# Altium PCB WGA_IR_V11.PcbDoc (part 1 of 2)
Units mm, origin at the board's own origin, x right, y up, seen from the top; angles counter-clockwise.
Board outline 80.01 x 83.31 mm, 2 copper layers (Top Layer, Bottom Layer); 107 components, 87 nets, 363 pads, 349 vias.
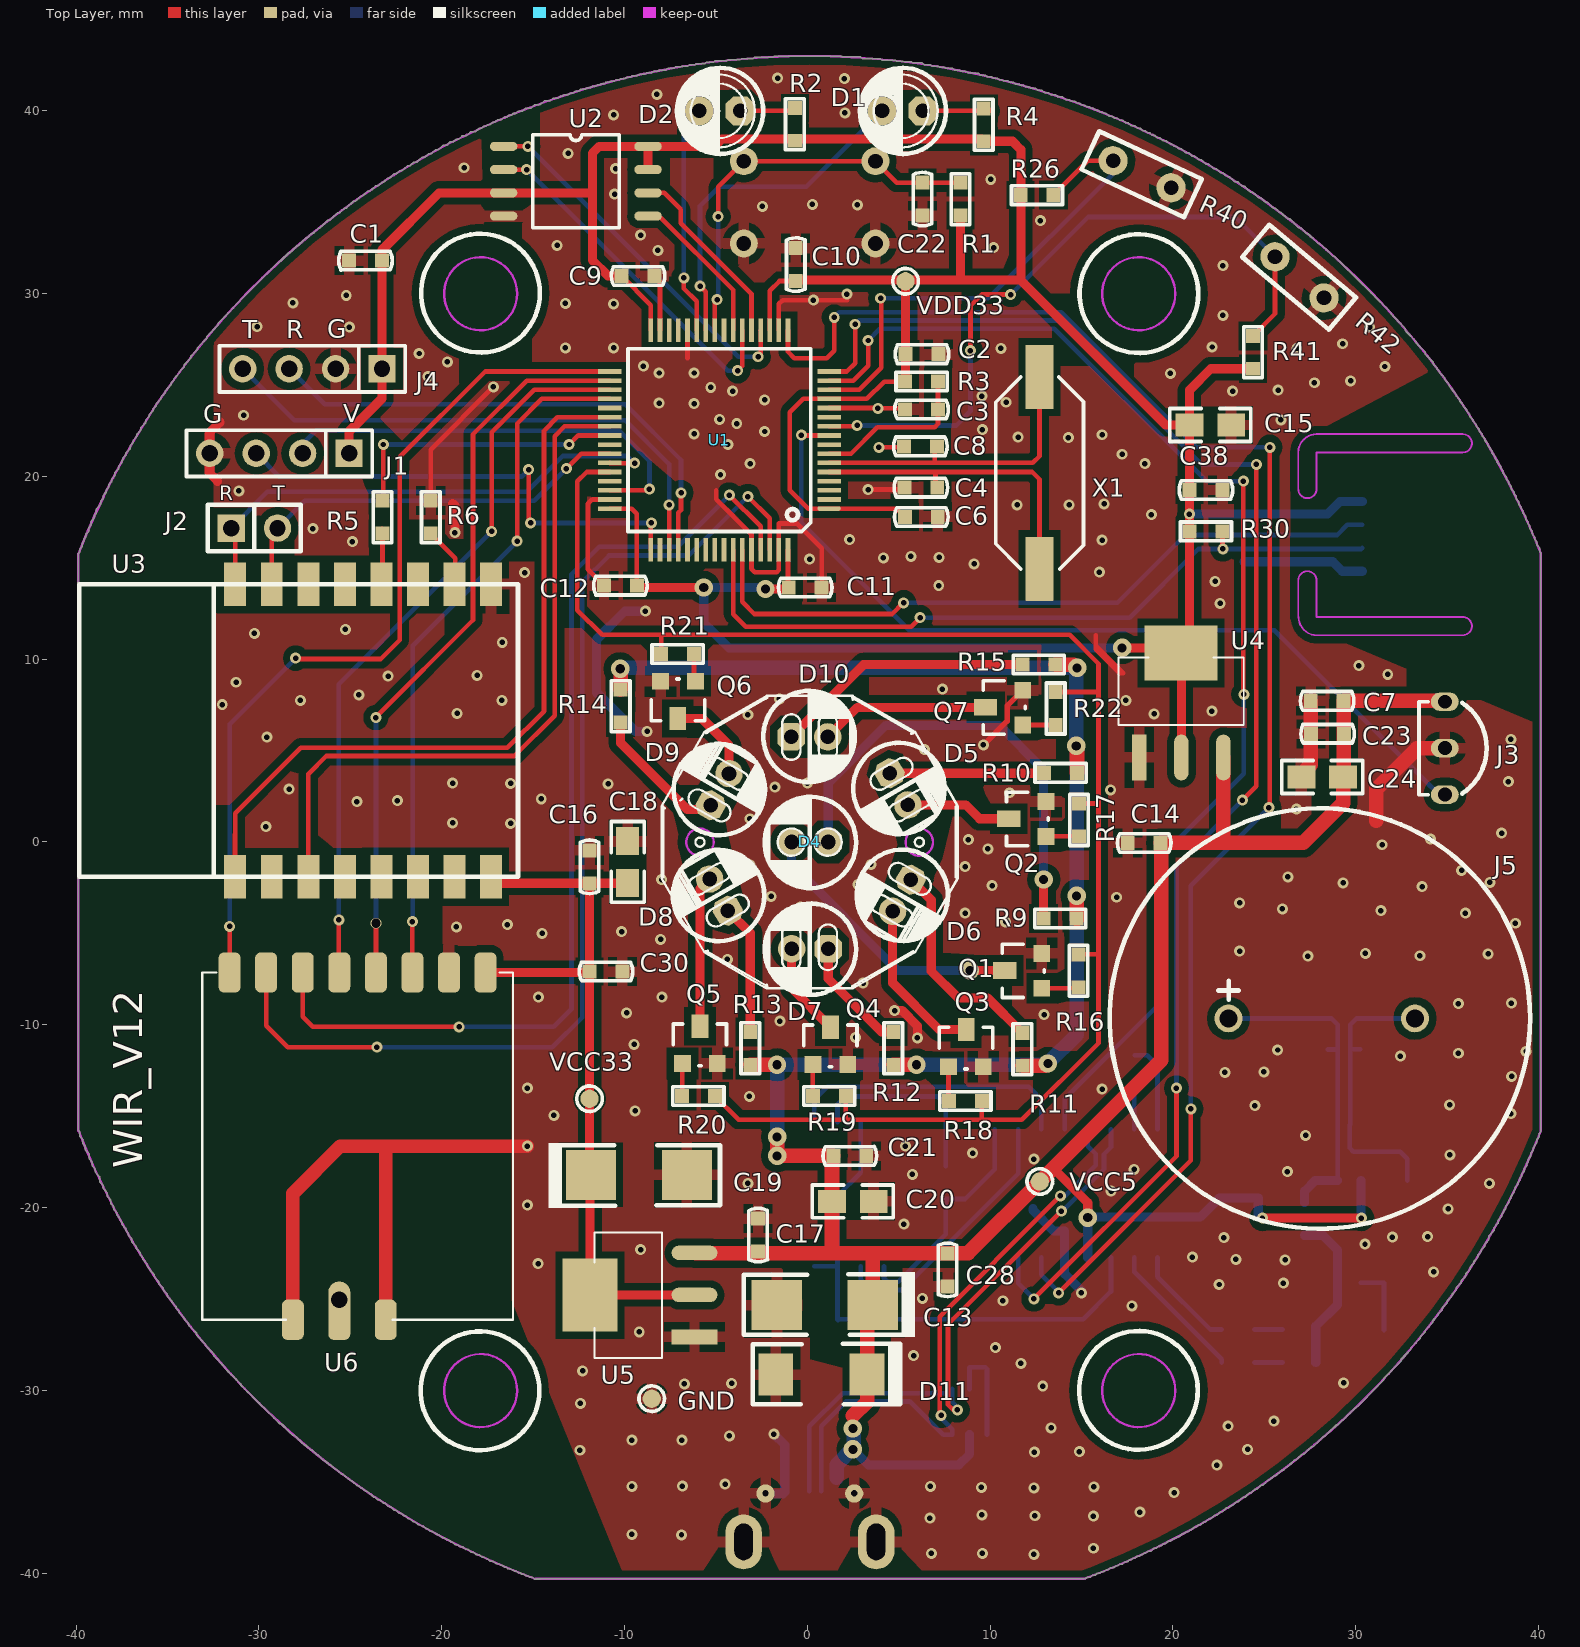
[diagram p0: Top Layer view]
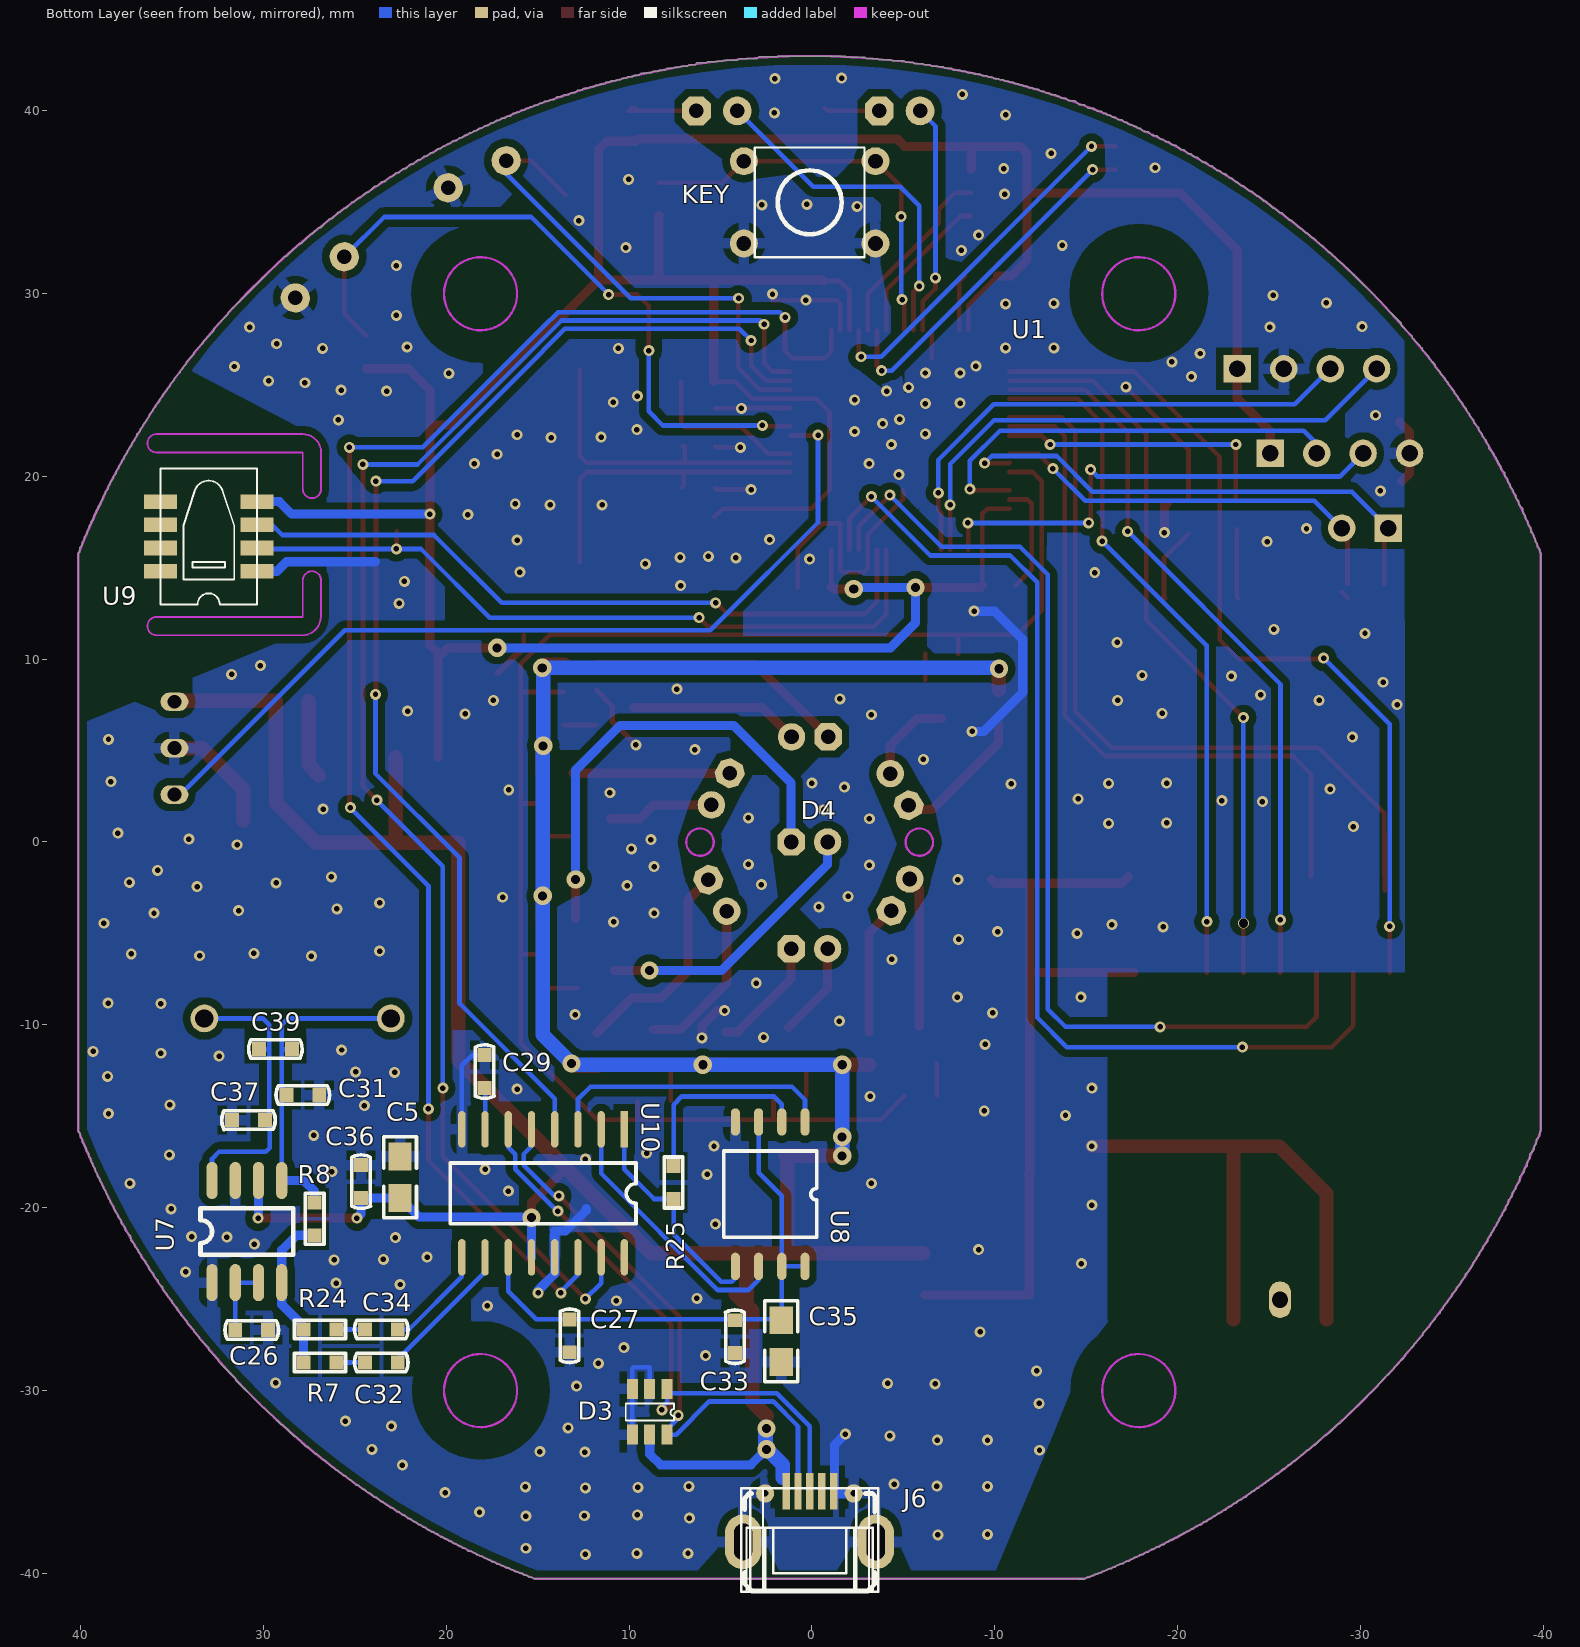
[diagram p1: Bottom Layer view, seen from below]
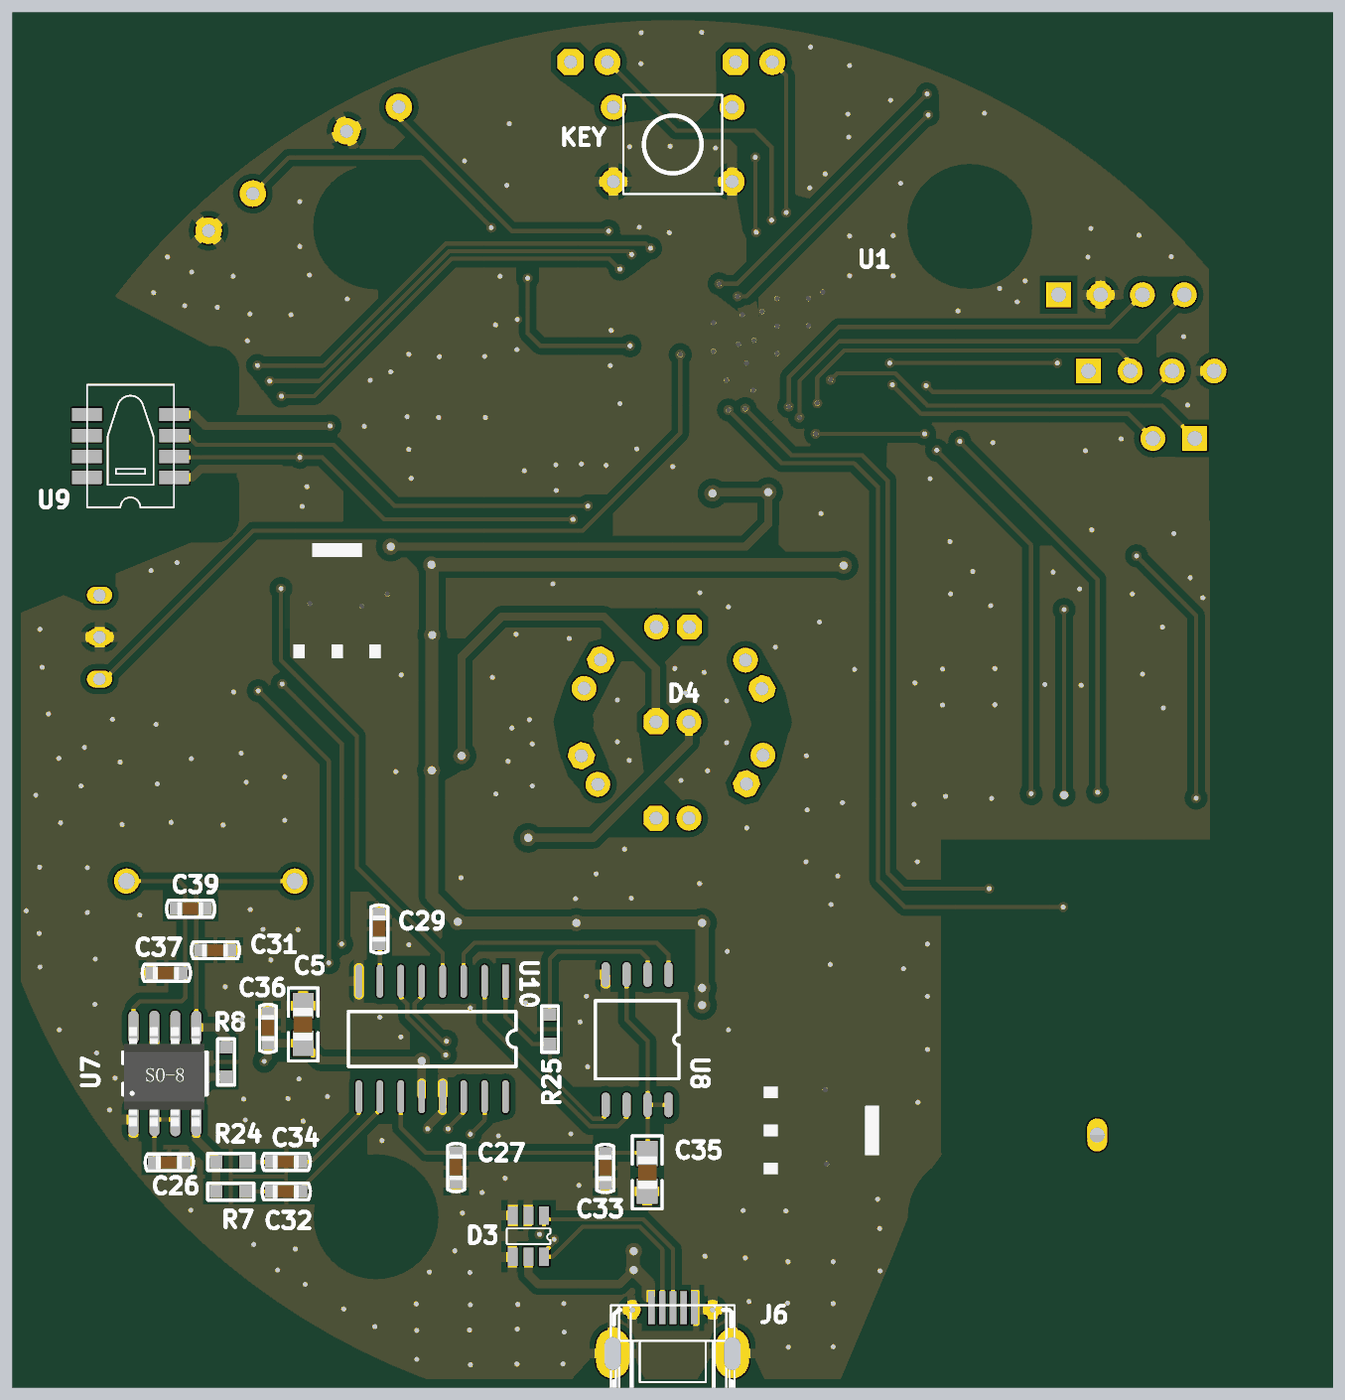
[diagram p3: 3D render of the assembled board from below, using the file's embedded part models]

## Layer stack, top to bottom
Top Solder: solder mask 0.0102, Solder Resist, Dk 3.5
Top Layer: signal copper 0.0356
Dielectric1: dielectric 0.32, FR-4, Dk 4.8
Bottom Layer: signal copper 0.0356
Bottom Solder: solder mask 0.0102, Solder Resist, Dk 3.5

## Board outline
1571 vertices, not listed, extent -39.878,-40.335 40.132,42.977

## Design rules (kind name [scope] priority, off if disabled: settings)
Clearance inpoly [inpoly] p1: gap=0.4 ignorepadtopadclearanceinfootprint=FALSE except(0: Arc-Hole Track-Hole SMDPad-Hole THPad-Hole Via-Hole Fill-Hole Poly-Hole Region-Hole Text-Hole)
Clearance [All] p2: gap=0.2 ignorepadtopadclearanceinfootprint=FALSE except(0: Arc-Hole Track-Hole SMDPad-Hole THPad-Hole Via-Hole Fill-Hole Poly-Hole Region-Hole Text-Hole)
FabricationTestPointUsage TestPointUsage [All] p1: valid=0 allowmultiple=FALSE
FabricationTestpoint Testpoint [(IsPad And (OnTopLayer Or OnBottomLayer))] p1: side=3 testpointundercomponent=TRUE minsize=1.016 maxsize=2.54 preferedsize=1.524 minholesize=0 maxholesize=1.016 preferedholesize=0.813 testpointgrid=0.025 allowsidetop=TRUE allowsidebottom=TRUE usegrid=TRUE gridtolerance=0
HoleSize [All] p1 off: absolutevalues=TRUE maxlimit=2.54 minlimit=0.025 maxpercent=80.000 minpercent=20.000
HoleToHoleClearance [All] p1 off: gap=0.203 allowstackedmicrovias=TRUE
LayerPairs [All] p1 off: enforce=TRUE
MinimumSolderMaskSliver [All] p1 off: minsoldermaskwidth=0.254
NetAntennae [All] p1 off: netantennaetolerance=0
PlaneConnect [All] p1: planeconnectstyle=Direct reliefexpansion=0.508 reliefentries=4 reliefconductorwidth=0.254 reliefairgap=0.254
PolygonConnect ISVIA [ISVIA] p1: connectstyle=Direct reliefconductorwidth=0.254 reliefentries=4 polygonreliefangle="90 Angle" airgapwidth=0.254
PolygonConnect [All] p2: connectstyle=Relief reliefconductorwidth=0.6 reliefentries=4 polygonreliefangle="90 Angle" airgapwidth=0.254
RoutingVias [All] p1: holewidth=0.3 width=0.6 viastyle="Through Hole" minholewidth=0.3 minwidth=0.6 maxholewidth=0.5 maxwidth=1
SilkToSilkClearance [All] p1 off: silktosilkclearance=0.254
SilkToSolderMaskClearance SilkscreenOverComponentPads [IsPad] p1 off: minsilkscreentomaskgap=0.254 clearancetoexposedcopper=TRUE
SolderMaskExpansion [All] p1: expansion=0.102
Width [All] p1: maxlimit=0.8 minlimit=0.254 preferedwidth=0.254
20 further rules are at their usual default settings.

## Classes and differential pairs
component class WGA_IR: C1 C2 C3 C4 C6 C8 C9 C10 C11 C12 D1 D2 J1 R2 R3 R4 U1 U2 X1
component class WGA_IR_P: C5 C7 C13 C14 C15 C16 C17 C18 C19 C20 C21 C22 C23 C24 C26 C27 C28 C29 C30 C31 C32 C33 C34 C35 C36 C37 C38 C39 D3 D4 D5 D6 D7 D8 D9 D10 D11 GND J2 J3 J4 J5 J6 KEY Q1 Q2 Q3 Q4 Q5 Q6 Q7 R1 R5 R6 R7 R8 R9 R10 R11 R12 R13 R14 R15 R16 R17 R18 R19 R20 R21 R22 R24 R25 R26 R30 R40 R41 R42 U3 U4 U5 U6 U7 U8 U9 U10 VCC5 VCC33 VDD33

## Components (designator, comment, footprint, x,y, rotation, side; value= is the part's Value field where it differs from the comment)
C1 "CC0603ZRY5V9BB104" C0603 -23.266,31.801 r180 top
C2 "CC0603ZRY5V9BB104" C0603 5.372,26.683 r0 top
C3 "CC0603ZRY5V9BB104" C0603 5.347,23.66 r0 top
C4 "CC0603JRNPO9BN200" C0603 5.309,19.38 r0 top
C5 "CC0805ZKY5V6BB106" C0805 22.53,-19.482 r90 bottom
C6 "CC0603ZRY5V9BB104" C0603 5.334,17.78 r0 top
C7 "CC0603JRNPO9BN101" C0603 29.337,7.722 r180 top
C8 "CC0603JRNPO9BN200" C0603 5.283,21.641 r0 top
C9 "CC0603ZRY5V9BB104" C0603 -10.16,30.963 r0 top
C10 "CC0603ZRY5V9BB104" C0603 -0.635,30.683 r90 top
C11 "CC0603ZRY5V9BB104" C0603 -1.016,13.919 r0 top
C12 "CC0603ZRY5V9BB104" C0603 -9.322,14.021 r180 top
C13 "TAJC227K010RNJ" C6032 3.581,-25.334 r180 top
C14 "CC0603ZRY5V9BB104" C0603 17.526,-0.051 r0 top
C15 "CC0805ZKY5V6BB106" C0805 20.904,22.809 r0 top
C16 "CC0603ZRY5V9BB104" C0603 -11.913,-2.261 r90 top
C17 "CC0603ZRY5V9BB104" C0603 -2.692,-20.599 r270 top
C18 "CC0805ZKY5V6BB106" C0805 -9.83,-2.235 r90 top
C19 "TAJC227K010RNJ" C6032 -11.836,-18.212 r0 top
C20 "CC0805ZKY5V6BB106" C0805 1.346,-19.66 r0 top
C21 "CC0603ZRY5V9BB104" C0603 1.422,-17.17 r0 top
C22 "CC0603ZRY5V9BB104" C0603 6.299,36.068 r270 top
C23 "CC0603ZRY5V9BB104" C0603 29.362,5.918 r180 top
C24 "CC0805ZKY5V6BB106" C0805 29.312,3.556 r180 top
C26 "CC0603ZRY5V9BB104" C0603 31.547,-26.695 r180 bottom
C27 "CC0603ZRY5V9BB104" C0603 13.259,-26.111 r270 bottom
C28 "CC0603ZRY5V9BB104" C0603 7.671,-22.504 r270 top
C29 "CC0603ZRY5V9BB104" C0603 17.907,-11.659 r270 bottom
C30 "CC0603ZRY5V9BB104" C0603 -11.913,-7.087 r0 top
C31 "CC0603JRNPO9BN330" C0603 28.753,-13.843 r180 bottom
C32 "CC0603ZRY5V9BB104" C0603 24.46,-28.471 r180 bottom
C33 "CC0603ZRY5V9BB104" C0603 4.216,-26.162 r270 bottom
C34 "CC0603ZRY5V9BB104" C0603 24.46,-26.668 r180 bottom
C35 "CC0805ZKY5V6BB106" C0805 1.676,-26.162 r270 bottom
C36 "CC0603ZRY5V9BB104" C0603 24.663,-17.678 r270 bottom
C37 "CC0603JRNPO9BN330" C0603 31.725,-15.215 r180 bottom
C38 "CC0603ZRY5V9BB104" C0603 20.904,19.253 r0 top
C39 "CC0603JRNPO9BN101" C0603 30.251,-11.328 r180 bottom
D1 "VLMS1300-GS08" T1-3MM_N 6.627,39.99 r0 top
D2 "VLMS1300-GS08" T1-3MM_N -3.373,39.99 r0 top
D3 "SRV05-4" SRV05-4 7.925,-29.921 r0 bottom
D4 "IRLED" "T1-5MM - 2N" 1.143,0 r0 top locked
D5 "IRLED" "T1-5MM - 2N" 4.501,3.759 r120 top locked
D6 "IRLED" "T1-5MM - 2N" 5.664,-2.057 r60 top locked
D7 "IRLED" "T1-5MM - 2N" 1.143,-5.842 r0 top locked
D8 "IRLED" "T1-5MM - 2N" -4.343,-3.759 r300 top
D9 "IRLED" "T1-5MM - 2N" -5.283,2.007 r240 top locked
D10 "IRLED" "T1-5MM - 2N" -0.882,5.747 r180 top locked
D11 "SMBJ6.0CA" D3528 -1.727,-29.134 r180 top
GND "CON1" PAD -8.509,-30.455 r90 top
J1 "CON4" SIP4 -25.07,21.26 r180 top
J2 "CON2-SIP2" SIP2 -31.521,17.17 r0 top
J3 "CON3" TO-92C 34.874,5.131 r90 top
J4 "调试串口" SIP4 -23.266,25.883 r180 top
J5 "喇叭" 加盖喇叭 23.038,-9.652 r0 top locked
J6 "0675031020" MICRO_USB-B -2.286,-35.636 r0 bottom locked
KEY "SW-PB 4" SWITCH(6*6*7) 3.127,37.99 r270 bottom
Q1 "NPN-SOT23" SOT23 12.827,-8.001 r90 top
Q2 "NPN-SOT23" SOT23 13.056,0.305 r90 top
Q3 "NPN-SOT23" SOT23 7.722,-12.294 r0 top
Q4 "NPN-SOT23" SOT23 0.305,-12.167 r0 top
Q5 "NPN-SOT23" SOT23 -6.833,-12.116 r0 top
Q6 "NPN-SOT23" SOT23 -6.121,8.788 r180 top
Q7 "NPN-SOT23" SOT23 11.786,6.401 r90 top
R1 "RC0603JR-0710KL" R0603 8.382,34.265 r90 top
R2 "RC0603JR-071KL" R0603 -0.686,40.157 r270 top
R3 "RC0603JR-07100KL" R0603 7.15,25.184 r180 top
R4 "RC0603JR-071KL" R0603 9.652,40.132 r270 top
R5 "RC0603JR-0710KL" R0603 -23.241,18.669 r270 top
R6 "RC0603JR-0710KL" R0603 -20.599,18.669 r270 top
R7 "RC0603JR-0720KL" R0603 27.813,-28.473 r180 bottom
R8 "RC0603JR-0747KL" R0603 27.203,-21.514 r90 bottom
R9 "RC0603JR-07470RL" R0603 12.929,-4.191 r0 top
R10 "RC0603JR-07470RL" R0603 12.954,3.785 r0 top
R11 "RC0603JR-07470RL" R0603 11.76,-10.439 r270 top
R12 "RC0603JR-07470RL" R0603 4.699,-10.389 r270 top
R13 "RC0603JR-07470RL" R0603 -3.124,-10.389 r270 top
R14 "RC0603JR-07470RL" R0603 -10.211,6.528 r90 top
R15 "RC0603JR-07470RL" R0603 11.76,9.703 r0 top
R16 "R0603" R0603 14.834,-7.95 r90 top
R17 "R0603" R0603 14.859,0.305 r90 top
R18 "R0603" R0603 7.747,-14.173 r0 top
R19 "R0603" R0603 0.305,-13.894 r0 top
R20 "R0603" R0603 -6.858,-13.894 r0 top
R21 "R0603" R0603 -6.198,10.287 r180 top
R22 "R0603" R0603 13.589,6.401 r90 top
R24 "RC0603JR-0720KL" R0603 27.813,-26.67 r180 bottom
R25 "RC0603JR-07100RL" R0603 7.569,-17.729 r270 bottom
R26 "390R/22K" R0603 13.462,35.382 r180 top
R30 "RC0603JR-0710KL" R0603 22.708,16.993 r180 top
R40 "JK250-110U" JK250-110U 18.313,36.525 r155 top
R41 "390R/22K" R0603 24.384,27.686 r270 top
R42 "JK250-110U" JK250-110U 26.924,30.886 r140 top
U1 "STM32F103RCT6" LQFP64 1.194,18.237 r180 top
U2 "MX25L3206EM2I-12G" SSOP8 -16.612,38.049 r0 top
U3 "ESP8266-12F" ESP-12F -15.697,14.097 r90 top
U4 "REG1117-3.3/2K5" SOT223 18.161,4.623 r0 top
U5 "REG1117-3.3/2K5" SOT223 -6.172,-27.076 r90 top
U6 "HPD8402A-433S" HPD8402A-433S -17.602,-7.137 r270 top locked
U7 "8002A" SO8 32.817,-24.105 r90 bottom
U8 "MX25L3206EM2I-12G" SSOP8 0.381,-15.316 r270 bottom
U9 "SHT10" SHT10 30.353,14.808 r90 bottom
U10 "JQ8400" SOP16 10.262,-15.723 r270 bottom
VCC5 "CON1" PAD 12.717,-18.576 r90 top
VCC33 "CON1" PAD -11.913,-14.046 r90 top
VDD33 "CON1" PAD 5.372,30.67 r90 top
X1 "9C-8.000MBBK-T" XTAL2 12.7,14.935 r90 top

## Footprints (in the part's own frame and the unit in brackets; to place one, negate y for a bottom-side part, rotate by r counter-clockwise, add the part's x,y. Pads: shape width x height; smd on the part's side, far side on the other; paste and mask are expansions set on the pad)
C0603 [mil]
  rect 30x30 smd: 1(0,0) 2(70.87,0)
  silkscreen extent -22,-20 93,20, body extent 3,-16 66,15, height 24
C0805 [mil]
  rect 60x50 smd: 1(0,0) 2(90,0)
  silkscreen extent -42,-35 132,35, body extent 6,-23 85,24, height 47
C6032 [mm]
  rect 2.75x2.75 smd: 1(0,0) 2(5.25,0)
  silkscreen extent -2.31,-1.8 7.06,1.75, body extent -0.38,-1.83 5.62,1.58, height 2.73
D3528 [mil]
  rect 75x90 smd: 1(0,0) 2(-196.85,0)
  silkscreen extent -268,-66 49,64, body extent -210,-54 7,56, height 114
ESP-12F [mm] "WIFI  ESP8266"
  rect 2.4x1.2 smd: 1(-16.002,15.6) 2(-16.002,13.6) 3(-16.002,11.6) 4(-16.002,9.6) 5(-16.002,7.6) 6(-16.002,5.6) 7(-16.002,3.6) 8(-16,1.6) 15(0,1.6) 16(0,3.6) 17(0,5.6) 18(0,7.6) 19(0,9.6) 20(0,11.6) 21(0,13.6) 22(0,15.6)
  silkscreen extent -16,0.13 0,24.13
HPD8402A-433S [mm]
  rrect50% 2.2x1.2 smd: 1(0,0) 2(0,-2) 3(0,-4) 4(0,-6) 5(0,-8) 6(0,-10) 7(0,-12) 8(0,-14) 9(19,-8) 10(19,-5.46) 11(19,-10.54)
  oval 2x1.2 hole 0.9: 9(17.9,-8)
  silkscreen extent 0,-15.5 19,1.5
JK250-110U [mm]
  round 1.6 hole 0.8: 1(-1.75,0) 2(1.75,0)
  silkscreen extent -3.07,-1.14 3.12,1.17
LQFP64 [mil]
  oval 50x10 smd: 1(0,0)
  rect 50x10 smd: 2(0,-19.69) 3(0,-39.37) 4(0,-59.06) 5(0,-78.74) 6(0,-98.43) 7(0,-118.11) 8(0,-137.8) 9(0,-157.48) 10(0,-177.17) 11(0,-196.85) 12(0,-216.54) 13(0,-236.22) 14(0,-255.91) 15(0,-275.59) 16(0,-295.28) 33(472.44,-295.28) 34(472.44,-275.59) 35(472.44,-255.91) 36(472.44,-236.22) 37(472.44,-216.54) 38(472.44,-196.85) 39(472.44,-177.17) 40(472.44,-157.48) 41(472.44,-137.8) 42(472.44,-118.11) 43(472.44,-98.43) 44(472.44,-78.74) 45(472.44,-59.06) 46(472.44,-39.37) 47(472.44,-19.69) 48(472.44,0)
  rect 10x50 smd: 17(88.58,-383.86) 18(108.27,-383.86) 19(127.95,-383.86) 20(147.64,-383.86) 21(167.32,-383.86) 22(187.01,-383.86) 23(206.69,-383.86) 24(226.38,-383.86) 25(246.06,-383.86) 26(265.75,-383.86) 27(285.43,-383.86) 28(305.12,-383.86) 29(324.8,-383.86) 30(344.49,-383.86) 31(364.17,-383.86) 32(383.86,-383.86) 49(383.86,88.58) 50(364.17,88.58) 51(344.49,88.58) 52(324.8,88.58) 53(305.12,88.58) 54(285.43,88.58) 55(265.75,88.58) 56(246.06,88.58) 57(226.38,88.58) 58(206.69,88.58) 59(187.01,88.58) 60(167.32,88.58) 61(147.64,88.58) 62(127.95,88.58) 63(108.27,88.58) 64(88.58,88.58)
  silkscreen extent 39,-344 433,49, body extent -3,-387 475,91, height 64
MICRO_USB-B [mm]
  rect 0.4x2 smd: 1(3.7,-0.127) 2(3.05,-0.127) 3(2.4,-0.127) 4(1.75,-0.127) 5(1.1,-0.127)
  round 1 hole 0.35: 6(4.85,0) 9(0,0)
  oval 2x3 hole 1 slot 2 at 90 deg: 7(6.05,2.65) 8(-1.2,2.65)
  silkscreen extent -1.14,0 5.97,5.33
PAD [mm]
  round 1 smd: 1(0,0)
  silkscreen extent -0.7,-0.7 0.7,0.7
R0603 [mil]
  rect 30x30 smd: 1(0,0) 2(70.87,0)
  silkscreen extent -20,-20 90,20, body extent 5,-16 67,15, height 21
SHT10 [mm]
  rect 0.8x1.8 smd: 1(0,0) 2(1.27,0) 3(2.54,0) 4(3.81,0) 5(3.81,5.28) 6(2.54,5.28) 7(1.27,5.28) 8(0,5.28)
  Keep-Out Layer lines w0.1: -3.5,-2.5 -3.5,5.5 cw(c-3,5.5) -2.5,5.5 -2.5,-2.5 -0.5,-2.5 cw(c-0.5,-3) -0.5,-3.5 -2.48,-3.5 -2.5,-3.48 cw(c-2.5,-2.48) -3.5,-2.48 ; 6.5,-3.5 ccw(c6.5,-2.5) 7.5,-2.5 7.5,5.5 ccw(c7,5.5) 6.5,5.5 6.5,-2.5 4.5,-2.5 ccw(c4.5,-3) 4.5,-3.5 6.5,-3.5 ; 6.5,-3.5 6.5,-3.5
  silkscreen extent -1.81,0 5.62,5.28
SIP2 [mm]
  rect 1.5x1.5 hole 0.9: 1(0,0)
  round 1.5 hole 0.9: 2(2.54,0)
  silkscreen extent -1.27,-1.27 3.81,1.27
SIP4 [mm]
  rect 1.5x1.5 hole 0.9: 1(0,0)
  round 1.5 hole 0.9: 2(2.54,0) 3(5.08,0) 4(7.62,0)
  silkscreen extent -1.27,-1.27 8.89,1.27
SO8 [mil]
  oval 80x24 smd: 1(0,0) 2(0,-50) 3(0,-100) 4(0,-150) 5(220,-150) 6(220,-100) 7(220,-50) 8(220,0)
  silkscreen extent 60,-175 160,25, body extent -16,-170 220,23, height 67
SOP16 [mm]
  rect 2x0.4 smd: 1(0,0)
  oval 2x0.4 smd: 2(0,-1.27) 3(0,-2.54) 4(0,-3.81) 5(0,-5.08) 6(0,-6.35) 7(0,-7.62) 8(0,-8.89) 9(7,-8.89) 10(7,-7.62) 11(7,-6.35) 12(7,-5.08) 13(7,-3.81) 14(7,-2.54) 15(7,-1.27) 16(7,0)
  silkscreen extent 1.84,-9.53 5.17,0.63
SOT23 [mil]
  rect 36x36 smd: 1(0,0) 2(75,0)
  rect 36x50 smd: 3(38,80)
  silkscreen extent -20,-5 95,85
SOT223 [mm]
  rect 0.8x2.5 smd: 1(0,0)
  oval 0.8x2.5 smd: 2(2.3,0) 3(4.6,0)
  rect 4x3 smd: 4(2.286,5.715)
  silkscreen extent -1.14,1.78 5.71,5.46, body extent -0.94,-0.79 5.56,6.21, height 1.19
SRV05-4 [mm]
  rect 0.6x1.1 smd: 1(0,0) 2(0.95,0) 3(1.9,0) 4(1.9,2.5) 5(0.95,2.5) 6(0,2.5)
  silkscreen extent -0.38,0.79 2.26,1.73
SSOP8 [mm]
  oval 1.5x0.5 smd: 1(0,0) 2(0,-1.27) 3(0,-2.54) 4(0,-3.81) 5(7.9,-3.81) 6(7.9,-2.54) 7(7.9,-1.27) 8(7.9,0)
  silkscreen extent 1.58,-4.44 6.32,0.64
SWITCH(6*6*7) [mm]
  round 1.524 hole 0.8: 1(0.75,-0.6) 2(0.75,6.6) 3(5.25,-0.6) 4(5.25,6.6)
  silkscreen extent 0,0 6,6
T1-3MM_N [mil]
  oct 62x62 hole 31.5: 1(-12,0)
  round 62 hole 31.5: 2(-100,0)
  silkscreen extent -148,-93 38,93
"T1-5MM - 2N" [mm]
  oct 1.5x1.5 hole 0.8: 1(0,0)
  round 1.5 hole 0.8: 2(-2,0)
  silkscreen extent -3.47,-2.52 1.52,2.47
TO-92C [mil]
  oval 40x60 hole 30: 1(-100,0) 2(0,0) 3(100,0)
  silkscreen extent -100,-90 100,56
XTAL2 [mm]
  rect 3.5x1.524 smd: 1(0,0) 2(10.5,0)
  silkscreen extent 0,-2.4 10.5,2.4, body extent -0.71,-2.51 11.29,2.39, height 4.6
加盖喇叭 [mil] "8ŷ 0.5w"
  round 60 hole 39.37: 1(0,0) 2(401.57,0)
  silkscreen extent -256,-453 650,453

## Part data
C1 C2 C3 C6 C9 C10 C11 C12 C14 C16 C17 C21 C22 C23 C26 C27 C28 C29 C30 C32 C33 C34 C36 C38: library part C0603_100nF, "CAP CER 0.1UF 50V Y5V 0603"
C4 C8: library part C0603_20p, "CAP CER 20PF 50V 5% NPO 0603"
C5 C15 C18 C20 C24 C35: library part C0805_10uF, "CAP CER 10UF 10V Y5V 0805"
C7 C39: library part C0603_100p, "CAP CER 100PF 50V 5% NPO 0603"
C13 C19: library part C6032_220uF_10V, "CAP TANT 220UF 10V 10% 2312"
C31 C37: library part C0603_33p, "CAP CER 33PF 50V 5% NPO 0603"
D1 D2: library part LED-D0603, "LED SUPER RED 0603 SMD VF=2V  I=20mA"
D3: "TVS SOT-26"
D11: library part D3528_TVS_6.0, "TVS DIODE 6VWM 10.3VC SMB"
GND J2 J3 VCC5 VCC33 VDD33: "Connector"
J1: "2.54mm dip"
J4: library part CON4, "2.54mm dip"
J5: library part CON2, "8欧 0.5w 直径10mm"
J6: library part MINI_USB, "CONN RECEPT MINIUSB R/A 5POS SMD"
Q1 Q2 Q3 Q4 Q5 Q6 Q7: "NPN Transistor"
R1 R5 R6 R30: library part R0603_10K_5%, "RES 10K OHM 1/10W 5% 0603 SMD"
R2 R4: library part R0603_1K_5%, "RES 1.0K OHM 1/10W 5% 0603 SMD"
R3: library part R0603_100K_5%, "RES 100K OHM 1/10W 5% 0603 SMD"
R7 R24: library part R0603_20K_5%, "RES 20K OHM 1/10W 5% 0603 SMD"
R8: library part R0603_47K_5%, "RES 47K OHM 1/10W 5% 0603 SMD"
R9 R10 R11 R12 R13 R14 R15: library part R0603_470_5%, "RES 470 OHM 1/10W 5% 0603 SMD"
R25: library part R0603_100_5%, "RES 100 OHM 1/10W 5% 0603 SMD"
R26 R41: library part RES-0805, "贴片电阻"
R40 R42: library part PTC
U1: library part STM32F103RC, "MCU ARM 128KB FLASH MEM 64-LQFP"
U2 U8: library part 25L3206, "IC FLASH 32MBIT 86MHZ 8SOP 32M (4M x 8)"
U3: "WIFI ESP-12F  ESP8266"
U4 U5: library part REG1117-3.3, "IC REG LDO 3.3V 0.8A SOT223"
U6: "RF TXRX MODULE CC1101 433Mhz"
U7: library part LM4890
U9: "贴片温湿度传感器SHT10"
X1: library part CRYSTAL-XTAL2, "CRYSTAL 8.000MHZ 20PF SMD"

## Via types
v1: diameter 0.6, hole 0.3, Top Layer to Bottom Layer, tented both sides, 331 vias
v2: diameter 1, hole 0.5, Top Layer to Bottom Layer, tented both sides, 17 vias
v3: diameter 0.6, hole 0.5, Top Layer to Bottom Layer, tented both sides, 1 vias

## Nets (pads, with @x,y where several pads share a name; then routed paths per layer and width w, separated by ;. In a path a pad name is that pad's centre, name@x,y a point inside that pad or via, vN(x,y) a via of type N, cw(c..) or ccw(c..) an arc to the next point about the centre after c; other vN are vias at no path point)
433_IO2: U1.61 U6.6 | length 55.6
  Top Layer w0.254: U6.6@-27.602,-7.137 -27.602,-9.558 -27.051,-10.109 -19.152,-10.109 v1@-19.101,-10.058 ; v1(-4.267,18.974) -2.556,17.263 U1.61@-2.556,15.987
  Bottom Layer w0.254: v1(-19.05,-10.109) -13.868,-10.109 -12.903,-9.144 -12.903,14.63 -11.379,16.154 -7.087,16.154 v1(-4.267,18.974)
+3V3: C27.1 C33.1 C35.1 U8.3 U8.7 U8.8 U10.11 | length 30.1
  Bottom Layer w0.254: U8.8@0.381,-23.216 U8.7@1.651,-23.216 ; U8.3@2.921,-15.316 2.921,-18.085 1.651,-19.355 U8.7@1.651,-23.216 ; U10.11@16.612,-22.723 16.612,-24.587 15.088,-26.111 C27.1@13.259,-26.111 1.727,-26.111 C35.1@1.676,-26.162 1.651,-26.137 U8.7@1.651,-23.216
BAT_DET: U1.8
BUSY: U1.15 U10.4 | length 68
  Top Layer w0.254: U1.15@1.194,25.237 2.504,25.237 3.327,26.06 v1(3.327,27.432) ; v1(23.851,19.736) 23.851,8.103 v1(23.876,8.077)
  Bottom Layer w0.254: v1(3.327,27.432) 3.969,28.073 13.513,28.073 15.936,25.651 15.936,25.644 21.844,19.736 v1(23.851,19.736) ; U10.4@14.072,-15.723 14.072,-14.044 19.279,-8.837 19.279,-0.864 23.876,3.734 23.876,4.394 ; 23.876,4.013 23.876,4.394 ; v1(23.876,8.077) 23.876,4.394
DAC-L: C34.2 U10.9 | length 5.8
  Bottom Layer w0.254: U10.9@19.152,-22.723 19.152,-23.774 22.045,-26.668 C34.2@22.66,-26.668
DAC-R: C32.2 U10.10 | length 7.7
  Bottom Layer w0.254: U10.10@17.882,-22.723 17.882,-23.52 22.66,-28.299 C32.2@22.66,-28.471
DATA: R30.1 U1.58 U9.2 | length 41
  Top Layer w0.254: U1.58@-4.056,15.987 -4.056,12.464 -3.375,11.782 5.686,11.782 v1(6.172,12.268) ; R30.1@22.708,16.993 22.708,16.053 v1(22.733,16.027)
  Bottom Layer w0.254: v1(6.172,12.268) 17.628,12.268 21.387,16.027 v1(22.733,16.027) 30.302,16.027 U9.2@30.353,16.078
DM: D3.6 J6.2 U10.5 | length 32.8
  Top Layer w0.254: v1@7.239,-31.369 7.239,-25.961 13.349,-19.851 ; 13.349,-19.849 v1(13.843,-19.355)
  Bottom Layer w0.254: J6.2@0.764,-35.509 0.764,-31.958 2.118,-30.604 5.61,-30.604 7.428,-32.421 D3.6@7.925,-32.421 7.925,-32.131 v1@7.239,-31.445 ; v1(13.843,-19.355) 14.097,-19.355 15.773,-17.678 15.773,-17.069 15.342,-16.637 U10.5@15.342,-15.723
  other v1: 7.315,-31.369
DP: D3.1 J6.3 U10.6 | length 32.9
  Top Layer w0.254: v1(8.204,-31.064) 7.976,-31.064 7.693,-30.782 7.693,-26.375 13.825,-20.244 13.894,-20.244 v1(13.894,-20.193)
  Bottom Layer w0.254: J6.3@0.114,-35.509 0.114,-31.966 1.93,-30.15 D3.1@7.925,-30.15 ; D3.1@7.925,-29.921 7.925,-30.632 8.204,-30.912 v1(8.204,-31.064) ; U10.6@16.612,-15.723 16.612,-16.688 16.227,-17.072 16.227,-17.91 v1@13.945,-20.193 ; v1@13.945,-20.193 v1(13.894,-20.193) 13.894,-20.244 v1@13.945,-20.193
GND: C1.2 C2.2 C3.1 C4.1 C5.2 C6.2 C7.2 C8.1 C9.2 C10.2 C11.2 C12.2 C13.2 C14.1 C15.2 C16.2 C17.1 C18.2 C19.2 C20.2 C21.2 C22.2 C23.2 C24.2 C26.2 C27.2 C28.2 C29.1 C30.2 C31.2 C33.2 C35.2 C36.1 C37.1 C38.2 D3.2 D3.3 D3.4 D11.1 GND.1 J1.4 J3.2 J4.2 J6.5 J6.6 J6.7 J6.8 J6.9 KEY.3 KEY.4 Q1.2 Q2.2 Q3.2 Q4.2 Q5.2 Q6.2 Q7.2 R6.1 R40.1 R42.1 U1.12 U1.18 U1.28 U1.31 U1.47 U1.60 U1.63 U2.4 U3.15 U4.1 U5.1 U6.2 U6.10 U6.11 U7.1 U7.7 U8.4 U9.1 U10.8 U10.13 | length 141.1
  Top Layer w0.254: R6.1@-20.599,18.669 -20.599,21.463 v1(-17.17,24.892) ; C12.2@-11.122,14.021 -12.014,14.913 -12.014,18.491 -11.768,18.737 U1.47@-10.806,18.737 ; C9.2@-8.36,30.963 -8.056,30.659 U1.31@-8.056,27.987 ; -6.556,26.47 U1.28@-6.556,27.987 ; -4.978,19.228 -4.978,18.742 -3.056,16.82 U1.60@-3.056,15.987 -3.056,14.945 -2.868,14.757 -1.676,14.757 -1.556,14.878 U1.63@-1.556,15.987 -1.556,17.424 -0.582,17.424 0.784,16.058 C11.2@0.784,13.919 ; U1.18@-1.556,27.987 -1.556,29.432 -1.346,29.642 2.184,29.642 2.159,29.667 v1(2.159,29.972) ; U1.12@1.194,23.737 v1@3.847,23.737 ; v1(3.327,19.279) 5.207,19.279 C4.1@5.309,19.38 ; v1(3.861,23.724) C3.1@5.283,23.724 ; v1(3.912,21.59) 5.232,21.59 C8.1@5.283,21.641 ; 15.773,11.303 15.773,10.548 16.38,9.942 16.38,9.935 17.094,9.22 17.272,9.22 15.824,10.668
  Top Layer w0.3: v1(9.627,5.309) 10.928,6.61 10.928,7.449 Q7.2@11.786,8.306
  Top Layer w0.5: -32.258,19.736 -32.69,20.168 J1.4@-32.69,21.26 -32.69,22.403 -32.131,22.962 ; -19.406,18.517 -19.279,18.39 v1(-19.279,16.916) ; v1(4.775,-9.22) 5.182,-9.22 6.02,-10.058 v1(6.02,-10.719)
  Top Layer w0.75: U6.11@-28.142,-26.137 -28.142,-19.227 -25.552,-16.637 -23.063,-16.637 ; U6.10@-23.062,-26.137 -23.062,-16.638 -23.063,-16.637 ; v1(-15.316,-16.637) -23.063,-16.637
  Top Layer w0.8: C24.2@26.975,3.654 27.537,4.216 C7.2@27.537,7.722 ; 31.115,1.168 31.115,2.896 33.35,5.131 J3.2@34.874,5.131
  Bottom Layer w0.254: J6.9@-2.286,-35.636 J6.9@-2.261,-35.636 ; D3.2@8.875,-29.921 8.875,-28.738 9.738,-28.738 9.825,-28.824 D3.3@9.825,-29.921 D3.4@9.825,-32.421 ; C29.1@17.907,-11.659 18.593,-11.659 19.152,-12.217 U10.8@19.152,-15.723
  Bottom Layer w0.3: v1@9.627,5.207 v1(9.627,5.309)
  Bottom Layer w0.5: v1(-8.865,12.624) -9.982,12.624 -11.532,11.074 -11.532,8.179 -9.398,6.045 v1(-8.763,6.045) ; J6.9@-2.261,-35.662 -1.338,-35.662 -1.237,-35.56 -1.237,-32.977 v1(-1.829,-32.385) ; 12.344,-20.066 12.344,-20.142 13.487,-21.285 14.072,-21.285 U10.13@14.072,-22.723 14.072,-23.622 14.986,-24.536 v1(14.986,-24.663) ; 23.888,15.328 28.741,15.328 29.261,14.808 U9.1@30.353,14.808
  other v1: 12.395,-38.964 6.782,-38.913 9.576,-38.913 15.646,-38.633 -6.883,-37.897 -9.601,-37.871 6.706,-36.982 15.646,-36.881 12.446,-36.855 9.55,-36.805 18.186,-36.652 20.066,-35.585 12.395,-35.331 9.525,-35.306 15.672,-35.281 -9.601,-35.255 6.731,-35.255 -6.833,-35.23 -4.496,-35.128 22.403,-34.087 12.421,-33.376 14.884,-33.35 -12.446,-33.274 24.079,-33.223 -9.601,-32.715 -6.859,-32.715 -4.267,-32.487 13.335,-32.055 23.012,-31.953 25.527,-31.674 -12.421,-30.709 12.878,-29.769 -6.731,-29.642 -4.14,-29.616 29.337,-29.591 -12.294,-28.931 11.684,-28.524 5.817,-28.092 10.287,-27.661 -9.195,-26.797 17.755,-25.375 10.693,-25.095 6.299,-24.968 22.53,-24.206 26.035,-24.13 34.265,-23.52 -14.732,-23.063 26.137,-22.86 23.444,-22.835 21.057,-22.708 -9.119,-22.301 30.505,-21.996 22.784,-21.641 32.004,-21.615 33.934,-21.59 5.283,-20.904 35.052,-20.066 -15.316,-19.863 16.612,-19.101 -3.251,-18.669 37.313,-18.669 5.74,-18.186 26.264,-18.034 17.882,-17.907 12.395,-17.348 35.154,-17.12 9.042,-17.018 5.359,-16.637 27.254,-16.053 -13.868,-14.961 38.481,-14.859 -9.423,-14.707 24.486,-14.427 35.128,-14.376 -3.175,-13.919 16.129,-13.513 -15.316,-13.462 38.532,-12.827 22.835,-12.598 24.968,-12.573 32.436,-11.709 35.611,-11.557 39.319,-11.455 25.73,-11.379 -9.474,-11.074 2.642,-10.693 -1.499,-9.804 12.954,-9.449 -9.881,-9.347 35.611,-8.839 38.506,-8.814 -14.707,-8.484 -7.95,-8.484 3.048,-7.722 -4.369,-6.426 27.381,-6.248 33.503,-6.223 37.236,-6.121 30.531,-6.096 23.647,-5.969 -8.026,-5.334 -14.503,-5.004 -10.16,-4.902 -19.202,-4.648 -16.408,-4.521 38.735,-4.445 10.846,-4.369 8.636,-3.886 35.992,-3.886 31.369,-3.759 25.984,-3.658 -0.381,-3.556 23.647,-3.327 16.916,-3.023 -1.981,-2.972 33.63,-2.438 10.109,-2.388 2.769,-2.337 29.312,-2.235 37.338,-2.21 -7.976,-2.057 26.289,-1.905 35.789,-1.549 8.636,-1.346 -3.143,-1.269 3.48,-1.219 9.881,-0.381 31.445,-0.152 8.814,0.127 34.087,0.152 37.973,0.483 -29.616,0.838 -16.231,1.016 -19.406,1.041 -3.143,1.271 3.48,1.321 -0.635,1.753 26.746,1.803 -24.638,2.21 -22.428,2.261 -14.554,2.362 11.049,2.692 16.586,2.845 -28.346,2.896 -1.778,2.997 -10.897,3.175 -16.231,3.2 -19.406,3.226 0,3.226 38.354,3.302 -6.096,4.521 6.401,5.055 38.481,5.613 -29.566,5.74 -3.251,6.96 18.974,7.01 -19.152,7.036 22.123,7.163 -32.004,7.518 -27.737,7.747 -16.713,7.747 17.424,7.747 -1.524,7.823 -24.536,8.052 7.391,8.357 -31.242,8.738 -22.936,9.068 -18.059,9.119 31.75,9.169 30.175,9.652 -16.688,10.922 -30.251,11.405 -25.273,11.633 22.581,13.056 7.188,14.021 22.301,14.249 -15.469,14.732 15.977,14.757 9.119,15.215 0.127,15.469 4.166,15.545 7.214,15.57 5.664,15.621 -24.892,16.434 16.129,16.51 2.311,16.535 -27.051,17.145 18.821,17.907 11.481,18.44 14.326,18.44 16.231,18.491 -31.09,19.202 -4.75,20.091 -3.124,20.701 18.466,20.701 17.221,21.209 -4.343,21.742 14.275,22.123 11.532,22.149 16.129,22.276 -6.198,22.327 -2.337,22.454 9.576,22.555 -3.861,22.885 25.908,23.089 -4.801,23.114 -30.836,23.343 -6.198,23.978 -8.103,24.003 10.871,24.054 -2.337,24.181 9.55,24.384 -4.089,24.663 23.266,24.663 25.756,24.714 -5.283,24.867 27.737,25.121 29.718,25.222 -20.752,25.451 19.863,25.629 -8.103,25.654 -6.198,25.654 31.598,26.01 -8.966,26.035 -19.685,26.264 -21.234,26.721 10.592,27 26.772,27 -13.233,27.026 -10.592,27.026 22.149,27.076 29.286,27.254 -25.044,28.169 30.759,28.169 -30.099,28.194 22.733,28.804 -10.592,29.439 -13.233,29.464 -28.143,29.489 0.33,29.642 -25.222,29.896 22.733,31.521 -8.179,32.36 10.185,32.512 -13.691,32.639 -9.119,33.198 12.751,33.985 -2.464,34.773 2.743,34.849 0.279,34.874 -10.541,35.433 10.033,36.246 -10.49,36.83 -18.771,36.881 -13.081,37.668 -10.592,39.776 2.057,39.878 -8.23,40.894 2.032,41.758 -1.626,41.783
HOT_EN: R41.1 R42.2 U1.10 | length 38.2
  Top Layer w0.254: U1.10@1.194,22.737 v1@2.671,22.737 ; v1(8.923,26.881) 8.923,29.32 9.55,29.947 v1(11.125,29.947) ; R41.1@24.384,27.686 25.583,28.885 R42.2@25.583,32.011
  Bottom Layer w0.254: v1(2.718,22.784) 8.153,22.784 8.923,23.554 v1(8.923,26.881) ; v1(11.125,29.947) 15.367,34.188 17.399,34.188 23.406,34.188 R42.2@25.583,32.011
IR_IN: J3.1 U1.9 | length 48
  Top Layer w0.254: v1(-0.33,22.25) -0.178,22.25 -0.165,22.237 U1.9@1.194,22.237
  Bottom Layer w0.254: v1(-0.33,22.25) -0.33,17.475 5.047,12.098 5.563,11.582 25.552,11.582 33.82,3.315 ; 34.112,3.023 33.82,3.315 ; J3.1@34.722,2.413 33.82,3.315
IR_OUT: R16.2 R17.2 R18.2 R19.2 R20.2 R21.2 R22.2 U1.44 | length 90.8
  Top Layer w0.254: U1.44@-10.806,20.237 -12.072,20.237 -12.576,19.733 -12.576,12.678 -11.227,11.328 14.351,11.328 15.926,9.754 15.926,8.201 ; R21.2@-7.998,10.287 -7.998,11.325 ; R20.2@-5.058,-13.894 -3.763,-15.189 2.105,-15.189 ; R19.2@2.105,-13.894 2.105,-15.189 ; R18.2@9.547,-14.173 9.547,-15.189 ; R22.2@13.814,8.201 R22.2@13.589,8.201 15.926,8.201 ; R16.2@14.834,-6.15 15.926,-6.15 ; R17.2@14.859,2.105 15.926,2.105 ; 2.105,-15.189 9.547,-15.189 ; 9.547,-15.189 11.735,-15.189 15.926,-10.998 15.926,-6.15 ; 15.926,-6.15 15.926,2.105 ; 15.926,2.105 15.926,8.201
KEY1: C22.1 KEY.1 KEY.2 R1.2 U1.25 | length 22.2
  Top Layer w0.254: U1.25@-5.056,27.987 -5.056,29.546 v1(-4.929,29.673) ; v1(-4.877,34.214) -4.877,35.836 KEY.2@-3.473,37.24 KEY.1@3.727,37.24 4.899,36.068 C22.1@6.299,36.068 8.379,36.068 R1.2@8.382,36.065
  Bottom Layer w0.254: v1@-4.877,29.725 v1(-4.877,34.214)
LED1: D1.2 U1.26 | length 19.1
  Top Layer w0.254: v1(-5.867,30.404) -5.556,30.093 U1.26@-5.556,27.987
  Bottom Layer w0.254: v1@-5.817,30.404 v1(-5.867,30.404) -5.867,34.798 -4.829,35.836 -0.067,35.836 D1.2@4.087,39.99
LED2: D2.2 U1.27 | length 12.6
  Top Layer w0.254: v1(-6.756,30.861) -6.756,30.277 -6.056,29.577 U1.27@-6.056,27.987
  Bottom Layer w0.254: v1(-6.756,30.861) -6.756,39.147 D2.2@-5.913,39.99
LIGHT_EN: R26.1 R40.2 U1.14 | length 27.4
  Top Layer w0.254: U1.14@1.194,24.737 2.842,24.737 4.039,25.933 4.039,29.718 v1(4.013,29.743) ; R26.1@13.462,35.382 15.345,37.265 R40.2@16.727,37.265
  Bottom Layer w0.254: v1(4.013,29.743) 9.906,29.743 16.727,36.565 R40.2@16.727,37.265
NetC4_2: C4.2 U1.5 X1.1 | length 17.1
  Top Layer w0.254: U1.5@1.194,20.237 7.01,20.237 ; C4.2@7.109,19.38 7.01,19.478 7.01,20.237 ; X1.1@12.7,15.316 12.7,19.85 12.312,20.237 7.01,20.237
NetC8_2: C8.2 U1.6 X1.2 | length 17.4
  Top Layer w0.254: U1.6@1.194,20.737 6.934,20.737 ; C8.2@7.083,21.641 6.966,21.641 6.966,20.769 6.934,20.737 ; X1.2@12.7,25.816 12.7,21.107 12.33,20.737 6.934,20.737
NetC26_1: C26.1 U7.2 U7.3 | length 3.9
  Bottom Layer w0.254: U7.3@30.277,-24.105 U7.2@31.547,-24.105 C26.1@31.547,-26.695
NetC29_2: C29.2 U10.7 | length 2.2
  Bottom Layer w0.254: U10.7@17.882,-15.723 C29.2@17.882,-13.484
NetC32_1: C32.1 R7.2 | length 1.6
  Bottom Layer w0.254: C32.1@24.46,-28.471 26.011,-28.471 R7.2@26.013,-28.473
NetC34_1: C34.1 R24.2 | length 1.6
  Bottom Layer w0.254: C34.1@24.46,-26.668 26.011,-26.668 R24.2@26.013,-26.67
NetD1_1: D1.1 R4.1 | length 4.1
  Top Layer w0.254: D1.1@6.322,39.99 10.018,39.99 9.876,40.132 R4.1@9.652,40.132
NetD2_1: D2.1 R2.1 | length 3.1
  Top Layer w0.254: D2.1@-3.678,39.99 -0.853,39.99 R2.1@-0.686,40.157
NetD4_1: D4.1 R9.1 | length 25.5
  Top Layer w0.5: R9.1@12.929,-4.191 v2(12.929,-2.057)
  Bottom Layer w0.5: D4.1@1.143,0 1.143,3.226 4.293,6.375 10.49,6.375 12.929,3.937 v2(12.929,-2.057)
NetD4_2: D4.2 Q1.3 | length 15.3
  Top Layer w0.5: v2(8.89,-7.036) Q1.3@10.795,-7.036
  Bottom Layer w0.5: D4.2@-0.857,0 -0.857,-1.226 4.953,-7.036 v2(8.89,-7.036)
NetD5_1: D5.1 R10.1 | length 9.1
  Top Layer w0.254: R10.1@13.005,3.81 R10.1@13.056,3.759
  Top Layer w0.5: D5.1@4.192,4.069 D5.1@4.501,3.759 R10.1@13.056,3.759
NetD5_2: D5.2 Q2.3 | length 5.8
  Top Layer w0.5: D5.2@5.492,1.817 D5.2@5.501,1.817 ; D5.2@5.501,2.027 8.666,2.027 9.423,1.27 Q2.3@11.024,1.27
NetD6_1: D6.1 R11.1 | length 12
  Top Layer w0.5: D6.1@5.41,-2.057 D6.1@5.41,-1.854 ; D6.1@5.664,-2.057 5.864,-2.257 6.782,-3.175 6.782,-7.061 8.255,-8.534 9.855,-8.534 R11.1@11.76,-10.439
NetD6_2: D6.2 Q3.3 | length 9
  Top Layer w0.5: D6.2@4.664,-3.789 4.664,-7.712 7.214,-10.262 Q3.3@8.687,-10.262
NetD7_1: D7.1 R12.1 | length 6.7
  Top Layer w0.5: D7.1@1.143,-5.842 1.143,-7.476 4.055,-10.389 R12.1@4.699,-10.389 ; D7.1@1.448,-5.842 D7.1@1.448,-5.512
NetD7_2: D7.2 Q4.3 | length 5.5
  Top Layer w0.5: D7.2@-1.152,-5.842 D7.2@-1.152,-5.512 ; D7.2@-0.857,-5.842 -0.857,-8.008 Q4.3@1.27,-10.135
NetD8_1: D8.1 R13.1 | length 7.1
  Top Layer w0.5: D8.1@-4.343,-3.759 -3.124,-4.978 R13.1@-3.124,-10.389
NetD8_2: D8.2 Q5.3 | length 8.5
  Top Layer w0.5: Q5.3@-5.867,-10.084 -5.867,-4.953 -5.867,-2.551 D8.2@-5.343,-2.027 ; D8.2@-5.334,-2.036 D8.2@-5.161,-1.863
NetD9_1: D9.1 R14.1 | length 7.9
  Top Layer w0.254: D9.1@-5.461,1.778 D9.1@-5.283,1.6
  Top Layer w0.5: R14.1@-10.211,6.528 -10.211,5.417 -6.572,1.778 -5.461,1.778 -5.283,1.778 D9.1@-5.207,1.778
NetD9_2: D9.2 Q6.3 | length 5
  Top Layer w0.5: Q6.3@-7.087,6.756 -5.76,6.756 -4.283,5.28 D9.2@-4.283,3.739
NetD10_1: D10.1 R15.1 | length 14.6
  Top Layer w0.5: D10.1@-1.143,5.486 D10.1@-0.882,5.747 3.073,9.703 R15.1@11.76,9.703
NetD10_2: D10.2 Q7.3 | length 9.3
  Top Layer w0.5: D10.2@1.118,5.747 2.737,7.366 Q7.3@9.754,7.366
NetQ1_1: Q1.1 R16.1 | length 2
  Top Layer w0.254: Q1.1@12.827,-8.001 R16.1@14.783,-8.001
NetQ2_1: Q2.1 R17.1 | length 1.8
  Top Layer w0.254: Q2.1@13.056,0.305 R17.1@14.859,0.305
NetQ3_1: Q3.1 R18.1 | length 1.9
  Top Layer w0.254: R18.1@7.722,-14.148 Q3.1@7.722,-12.294
NetQ4_1: Q4.1 R19.1 | length 1.7
  Top Layer w0.254: R19.1@0.305,-13.894 Q4.1@0.305,-12.167
NetQ5_1: Q5.1 R20.1 | length 1.8
  Top Layer w0.254: R20.1@-6.858,-13.894 -6.833,-13.868 Q5.1@-6.833,-12.116
NetQ6_1: Q6.1 R21.1 | length 1.4
  Top Layer w0.254: Q6.1@-6.198,8.865 R21.1@-6.198,10.287
NetQ7_1: Q7.1 R22.1 | length 1.8
  Top Layer w0.254: Q7.1@11.786,6.401 R22.1@13.589,6.401
NetR5_2: R5.2 U3.18 | length 3.8
  Top Layer w0.254: U3.18@-23.323,13.335 -23.241,13.417 -23.241,15.621 R5.2@-23.241,16.869 -23.241,17.094 R5.2@-23.266,17.12
NetR6_2: R6.2 U3.16 | length 4.1
  Top Layer w0.254: R6.2@-20.599,16.869 -19.253,15.523 -19.253,14.097 -19.253,14.095 -19.253,13.404 U3.16@-19.323,13.335
NetR7_1: R7.1 R8.1 R24.1 U7.4 | length 8.8
  Bottom Layer w0.5: R8.1@27.203,-21.514 28.194,-21.514 29.007,-22.327 U7.4@29.007,-24.105 29.007,-25.298 27.813,-26.492 R24.1@27.813,-26.67 R7.1@27.813,-28.473
NetU6_9: U6.9
NRST: C3.2 R3.1 U1.7 | length 8.9
  Top Layer w0.254: U1.7@1.194,21.237 2.39,21.237 3.835,22.682 6.172,22.682 6.96,22.682 7.147,22.869 C3.2@7.147,23.66 7.15,23.664 R3.1@7.15,25.184
NTRST: U1.56
RXD1: J2.1 U1.43 U3.22 | length 28.4
  Top Layer w0.254: J2.1@-31.521,17.17 -31.297,16.946 U3.22@-31.297,14.097 ; U1.43@-10.806,20.737 -10.795,20.726 v1(-9.449,20.726)
  Bottom Layer w0.254: J2.1@-31.521,17.17 -29.537,19.155 -15.342,19.155 -13.381,21.115 -9.84,21.115 -9.451,20.726 v1(-9.449,20.726)
RXD2: U1.17 U10.14 | length 86.9
  Top Layer w0.254: U1.17@-1.056,27.987 -1.056,26.812 -0.711,26.467 1.067,26.467 1.473,26.873 v1(1.473,28.702) ; v1@13.792,-24.663 v1(13.741,-24.663) 14.63,-23.774 ; 14.249,-24.155 14.63,-23.774 ; v1(20.98,-14.605) 20.98,-17.424 14.63,-23.774 ; v1(25.248,1.88) 25.298,1.93 v1(25.298,21.59)
  Bottom Layer w0.254: v1(1.473,28.702) 1.753,28.981 13.889,28.981 14.698,28.172 14.806,28.065 21.281,21.59 v1(25.298,21.59) v1@25.324,21.59 ; U10.14@12.802,-22.723 12.802,-23.673 13.792,-24.663 v1(13.741,-24.663) ; v1(20.98,-14.605) 20.98,-2.388 v1(25.248,1.88)
RXD3: U1.30
RXD4: J4.3 U1.52 | length 28.5
  Top Layer w0.254: U1.52@-7.056,15.987 -7.056,18.014 -6.909,18.161 v1(-6.909,19.101)
  Bottom Layer w0.254: J4.3@-28.346,25.883 -26.399,23.935 -9.949,23.935 -6.909,20.895 v1(-6.909,19.101)
SCK: U1.59 U9.3 | length 39.1
  Top Layer w0.254: U1.59@-3.556,15.987 -3.556,13.132 -2.896,12.471 4.635,12.471 v1@5.245,13.081
  Bottom Layer w0.254: v1@5.245,13.081 v1(5.271,13.081) 16.967,13.081 20.679,16.793 28.985,16.793 29.54,17.348 U9.3@30.353,17.348
SMARTLINK: U1.57
SPI1_MISO: U1.22 U2.2 | length 19.7
  Top Layer w0.254: U2.2@-16.612,36.779 v1(-15.357,36.779) ; v1(-3.81,25.781) -3.556,26.035 U1.22@-3.556,27.987
  Bottom Layer w0.254: v1(-15.357,36.779) -4.359,25.781 v1(-3.81,25.781)
SPI1_MOSI: U1.23 U2.5 | length 8.5
  Top Layer w0.254: U2.5@-8.712,34.239 -8.103,34.239 -4.056,30.193 U1.23@-4.056,27.987
SPI1_NSS: U1.20 U2.1 | length 20.2
  Top Layer w0.254: U2.1@-16.612,38.049 v1(-15.291,38.049) ; v1(-2.692,26.543) -2.556,26.679 U1.20@-2.556,27.987 U1.20@-2.565,27.978
  Bottom Layer w0.254: v1(-15.291,38.049) -3.785,26.543 v1(-2.692,26.543)
SPI1_SCK: U1.21 U2.6 | length 10.4
  Top Layer w0.254: U2.6@-8.712,35.509 -7.823,35.509 -6.924,34.61 -6.924,33.855 -3.056,29.987 U1.21@-3.056,27.987
SPI2_INT: U1.62 U6.7 | length 59.6
  Top Layer w0.254: U6.7@-29.602,-7.137 -29.602,-10.044 -28.42,-11.227 v1(-23.546,-11.227) ; v1(-3.251,18.898) -2.056,17.703 U1.62@-2.056,15.987
  Bottom Layer w0.254: v1(-23.546,-11.227) -13.945,-11.227 -12.319,-9.601 -12.319,14.199 -10.846,15.672 -6.477,15.672 v1(-3.251,18.898)
SPI2_MISO: U1.35 U6.5 | length 40.9
  Top Layer w0.254: v1(-25.629,-4.267) -25.629,-7.111 U6.5@-25.602,-7.137 ; v1(-17.272,16.993) -17.272,22.403 -14.938,24.737 -13.894,24.737 ; -14.379,24.737 -13.894,24.737 ; U1.35@-10.806,24.737 -13.894,24.737
  Bottom Layer w0.254: v1(-25.629,-4.267) -25.629,8.636 v1(-17.272,16.993)
SPI2_MOSI: U1.36 U6.3 | length 38
  Top Layer w0.254: U6.3@-21.602,-7.137 v1(-21.602,-4.356) ; v1(-15.875,16.459) -15.875,22.891 -14.529,24.237 U1.36@-10.806,24.237
  Bottom Layer w0.254: v1(-21.602,-4.356) -21.59,-4.343 -21.59,10.744 v1(-15.875,16.459)
SPI2_NSS: U1.33 U6.8 | length 48.4
  Top Layer w0.254: U6.8@-31.602,-7.137 -31.598,-7.133 v1(-31.598,-4.623) ; v1(-27.991,10.058) -28.042,10.008 -23.343,10.008 -22.301,11.049 -22.301,20.354 -22.291,20.364 -22.291,21.067 -17.621,25.737 U1.33@-10.806,25.737
  Bottom Layer w0.254: v1(-31.598,-4.623) -31.598,6.452 v1(-27.991,10.058)
SPI2_SCK: U1.34 U6.4 | length 40.3
  Top Layer w0.254: U6.4@-23.602,-7.137 -23.597,-7.132 v3(-23.597,-4.445) ; v1(-23.597,6.807) -23.597,6.833 -18.288,12.141 -18.288,22.301 -15.352,25.237 U1.34@-10.806,25.237
  Bottom Layer w0.254: v3(-23.597,-4.445) v1(-23.597,6.807)